# EAGLE board lm3405-12v (EAGLE 6.4)
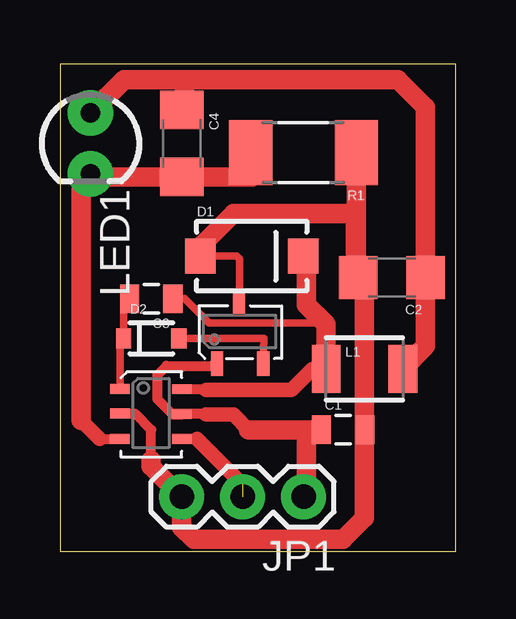
[diagram p0: board, top side]

Size 16.51 x 20.32 mm. Coordinates in mm from the lower left corner, seen from the top.
Outline: 0,0 16.51,0 16.51,20.32 0,20.32 0,0
Copper layers (1*16): Top 0.035mm / dielectric 1.5mm / Bottom 0.035mm
Design rules "default": minimum track width 10mil, minimum drill 24mil, track to track 8mil, track to pad 8mil, pad to pad 8mil, via to via 8mil, smd to smd 8mil, copper to edge 40mil, drill to drill 8mil, minimum pad ring 10mil, minimum via ring 8mil, stop-mask expansion 4mil, vias tented up to drill 0mil, thermal gap 10mil

## Footprints (pad centres in the part's own frame; a part is rotated, then mirrored left to right if it is on the bottom)
0805 = smd 0.8 x 1.2: 1 -0.9,0; 2 0.9,0
1206 = smd 1.6 x 1.8: 1 -1.4,0; 2 1.4,0
SMA-DIODE = smd 1.27 x 1.47: A -2.15,0; C 2.15,0
SOD-323 = smd 0.63 x 0.83: 1 -1.15,0; 2 1.15,0
1X03 = drill 1.016 pad 1.88: 1 0,0; 2 2.54,0; 3 5.08,0
1210 = smd 1.2 x 2: 1 -1.6,0; 2 1.6,0
LED3MM = drill 0.813 pad 1.88: A -1.27,0; K 1.27,0
R2010 = smd 1.8 x 2.7: 1 -2.2,0; 2 2.2,0
TSOT-6 = smd 0.406 x 0.813: 1 -1.06,-1.3; 2 -0.04,-1.32; 3 1.02,-1.32; 4 1.02,1.27; 5 -0.02,1.27; 6 -1.05,1.28
SOT-23-3 = smd 0.508 x 1.016: 1 -0.941,-1.312; 2 0.986,-1.312; 3 -0.03,1.282

## Placement (x,y rotation side)
C1  10uF  [0805]  11.81,5.08 0 top
C2  1uF  [1206]  13.84,11.43 180 top
C3  10nF  [0805]  3.81,10.54 180 top
C4  1uF  [1206]  5.08,17.02 270 top
D1  [SMA-DIODE]  8,12.32 0 top
D2  [SOD-323]  3.81,8.89 0 top
JP1  [1X03]  10.16,2.29 180 top
L1  4.7uH  [1210]  12.7,7.62 0 top
LED1  [LED3MM]  1.27,17.02 270 top
R1  0.2  [R2010]  10.16,16.64 180 top
U$1  LM3405TSOT-6  [TSOT-6]  3.81,5.71 270 top
U$2  MAX6100-MAX6107  [SOT-23-3]  7.49,9.14 0 top

## Library data of the parts
C1-C4 = SparkFun-Capacitors
D1 D2 = SparkFun-DiscreteSemi
JP1 = SparkFun-Connectors
L1 = SparkFun-Passives
LED1 = SparkFun-LED
R1 = SparkFun-Resistors
U$1 U$2 = Synapseware

## Nets
GND: C1.2 C2.2 D1.A JP1.3 R1.1 U$1.2 U$2.3
N$1: C3.1 D1.C L1.1 U$1.6
N$2: C4.2 LED1.K R1.2 U$1.3
N$3: C3.2 D2.1 U$1.1
N$4: C2.1 C4.1 L1.2 LED1.A
N$6: D2.2 U$2.2
PWM: JP1.2 U$1.4
VCC: C1.1 JP1.1 U$1.5 U$2.1

## Tracks (layer width: path | path; a pad name or v marks a point on that pad's centre or on a via)
GND
  Top 0.305: 7.46,10.7 7.49,10.73 7.49,12.19 7.37,12.32 D1.A
  Top 0.406: 3.81,3.81 3.81,5.08 3.13,5.75 U$1.2 | U$2.3 7.46,10.7 | 5.97,12.19 5.84,12.7
  Top 0.813: D1.A 5.84,12.7 | 5.97,12.19 5.97,12.83 7.24,14.1 12.06,14.1 12.32,14.35 12.32,11.55 C2.2 | C2.2 12.44,11.18 12.7,10.92 C1.2 12.7,1.4 11.81,0.51 5.59,0.51 5.08,1.02 JP1.3 3.81,3.56 3.81,3.81 | C2.2 12.36,11.51 R1.1
N$1
  Top 0.305: 11.05,9.53 6.22,9.53 5.21,10.54 C3.1
  Top 0.406: 6.1,6.73 6.06,6.76 U$1.6
  Top 0.61: 10.99,7.81 11.18,8 | 6.1,6.73 9.65,6.73 10.54,7.62 L1.1
  Top 0.813: D1.C 10.29,12.56 10.29,10.29 11.05,9.53 11.1,9.47 L1.1 10.99,7.73 10.99,7.81
N$2
  Top 0.406: U$1.3 1.65,4.7
  Top 0.61: 1.65,4.7 0.89,5.46
  Top 0.813: 0.89,5.46 0.89,15.24 1.27,15.62 LED1.K 1.4,15.62 C4.2 5.21,15.62 8,15.62 7.96,15.79 R1.2
N$3
  Top 0.305: C3.2 2.66,10.54 D2.1 2.51,8.74 U$1.1
N$4
  Top 0.813: 5.21,19.68 2.67,19.68 LED1.A | 5.21,19.68 14.1,19.68 15.24,18.54 C2.1 15.24,8.56 L1.2 | C4.1 5.21,18.55 5.21,19.68
N$6
  Top 0.305: 8.48,7.9 8.51,8.89 D2.2 | 4.96,8.76 D2.2
  Top 0.406: U$2.2 8.48,7.9 | D2.2 4.96,8.76
PWM  (1 unrouted)
  Top 0.406: U$1.4 5.72,4.7
  Top 0.61: 5.72,4.7 7.62,2.79
VCC
  Top 0.406: U$2.1 6.34,7.75 4.45,7.75 4.06,7.37 4.06,6.35 4.7,5.71 5.06,5.71 U$1.5 6.08,5.74 6.1,5.71
  Top 0.61: 7.87,5.08 7.24,5.71 6.1,5.71
  Top 0.813: 10.29,5.08 7.87,5.08 | JP1.1 10.29,2.41 10.29,5.08 | C1.1 10.29,5.08